# Altium PCB 假肢工作电路图.PcbDoc
Units mm, origin at the board's own origin, x right, y up, seen from the top; angles counter-clockwise.
Board outline 60.83 x 102.62 mm, 2 copper layers (Top Layer, Bottom Layer); 118 components, 92 nets, 450 pads, 0 vias.
Unrouted connection lines stored in the file: 279.
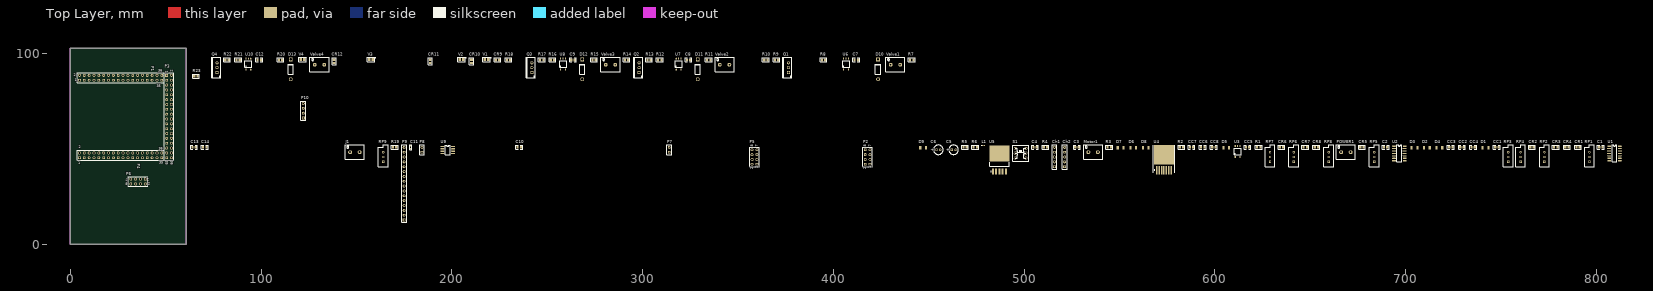
[diagram p0: Top Layer view]
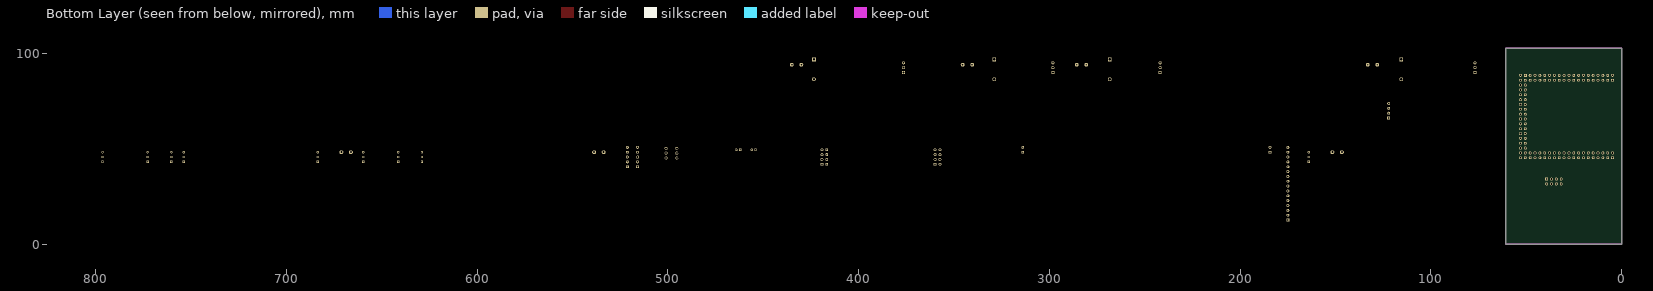
[diagram p1: Bottom Layer view, seen from below]

## Layer stack, top to bottom
Top Solder: solder mask 0.0102, Solder Resist, Dk 3.5
Top Layer: signal copper 0.0356
Dielectric 1: dielectric 0.32, FR-4, Dk 4.8
Bottom Layer: signal copper 0.0356
Bottom Solder: solder mask 0.0102, Solder Resist, Dk 3.5

## Board outline
0,0 60.833,0 60.833,102.616 0,102.616

## Design rules (kind name [scope] priority, off if disabled: settings)
Clearance Clearance_1 [P3 vs P1] p1: gap=0 ignorepadtopadclearanceinfootprint=FALSE
Clearance [All] p2: gap=0.254 ignorepadtopadclearanceinfootprint=FALSE except(0: Arc-Hole Track-Hole SMDPad-Hole THPad-Hole Via-Hole Fill-Hole Poly-Hole Region-Hole Text-Hole)
HoleToHoleClearance [All] p1 off: gap=0 allowstackedmicrovias=TRUE
MinimumSolderMaskSliver [All] p1 off: minsoldermaskwidth=0.254
NetAntennae [All] p1 off: netantennaetolerance=0
PolygonConnect [All] p1: connectstyle=Relief reliefconductorwidth=0.254 reliefentries=4 polygonreliefangle="90 Angle" airgapwidth=0.254
RoutingVias [All] p1: holewidth=0.711 width=1.27 viastyle="Through Hole" minholewidth=0.711 minwidth=1.27 maxholewidth=0.711 maxwidth=1.27
SilkToSilkClearance [All] p1 off: silktosilkclearance=0
SilkToSolderMaskClearance [IsPad] p1 off: minsilkscreentomaskgap=0 clearancetoexposedcopper=TRUE
SolderMaskExpansion [All] p1: expansion=0.102
Width [All] p1: maxlimit=0.254 minlimit=0.254 preferedwidth=0.254
25 further rules are at their usual default settings.

## Components (designator, comment, footprint, x,y, rotation, side; value= is the part's Value field where it differs from the comment)
C1 "104" LC-0805_C 802.259,50.673 r0 top
C2 "104" LC-0805_C 689.483,50.673 r0 top
C3 "0.1uF" LC-0805_C 527.685,50.673 r0 top
C4 "0.1uF" LC-0805_C 505.714,50.673 r0 top
C5 "10uF,16V" CAPPR2-5X5 463.042,49.403 r0 top value=680uF
C6 "10uF,16V" CAPPR2-5X5 455.041,49.403 r0 top value=220uF
C7 "0.1uF" LC-0805_C 411.988,96.52 r0 top
C8 "0.1uF" LC-0805_C 324.104,96.52 r0 top
C9 "0.1uF" LC-0805_C 263.525,96.52 r0 top
C10 "100nF" LC-0805_C 235.331,50.673 r0 top
C11 "100nF" 0603 178.562,50.038 r90 top
C12 "0.1uF" LC-0805_C 99.06,96.52 r0 top
C13 "27pF" LC-0805_C 64.897,50.673 r0 top value=25V
C14 "27pF" LC-0805_C 70.485,50.673 r0 top value=25V
CC1 "105" LC-0805_C 747.776,50.673 r0 top
CC2 "105" LC-0805_C 729.488,50.673 r0 top
CC3 "105" LC-0805_C 723.646,50.673 r0 top
CC4 "105" LC-0805_C 735.33,50.673 r0 top
CC5 "105" LC-0805_C 617.093,50.673 r0 top
CC6 "105" LC-0805_C 593.598,50.673 r0 top
CC7 "105" LC-0805_C 587.756,50.673 r0 top
CC8 "105" LC-0805_C 599.44,50.673 r0 top
Ch1 "Header 5" HDR1X5 515.874,40.513 r90 top
Ch2 "Header 5" HDR1X5 521.208,40.513 r90 top
CR1 "150" LC-0805_R 790.321,50.673 r0 top
CR2 "150" LC-0805_R 766.191,50.673 r0 top
CR3 "150" LC-0805_R 778.637,50.673 r0 top
CR4 "150" LC-0805_R 784.479,50.673 r0 top
CR5 "150" LC-0805_R 677.037,50.673 r0 top
CR6 "150" LC-0805_R 634.873,50.673 r0 top
CR7 "150" LC-0805_R 647.319,50.673 r0 top
CR8 "150" LC-0805_R 653.161,50.673 r0 top
CR9 "1K" LC-0805_R 223.901,96.52 r0 top
CR10 "1K" LC-0805_R 210.312,95.758 r90 top
CR11 "1K" LC-0805_R 188.722,95.758 r90 top
CR12 "1K" LC-0805_R 138.303,95.758 r90 top
D1 "Diode  Zener" LC-1206 741.807,50.546 r0 top
D2 "Diode  Zener" LC-1206 711.073,50.546 r0 top
D3 "Diode  Zener" LC-1206 704.596,50.546 r0 top
D4 "Diode  Zener" LC-1206 717.677,50.546 r0 top
D5 "Diode  Zener" LC-1206 605.917,50.546 r0 top
D6 "Diode  Zener" LC-1206 557.149,50.546 r0 top
D7 "Diode  Zener" LC-1206 550.545,50.546 r0 top
D8 "Diode  Zener" LC-1206 563.753,50.546 r0 top
D9 "IN5824" LC-1206 447.04,50.546 r0 top
D10 "Diode 1N4001" DO-41 423.418,91.567 r90 top
D11 "Diode 1N4001" DO-41 328.93,91.567 r90 top
D12 "Diode 1N4001" DO-41 268.351,91.567 r90 top
D13 "Diode 1N4001" DO-41 115.57,91.567 r90 top
J1 "端子2P" DUANZI2P 146.685,48.133 r0 top
L1 "Inductor" 0402-A 478.79,51.562 r0 top value=33uH
Motor1 "端子2P" DUANZI2P 533.654,48.133 r0 top
P1 "Header 18X2" HDR2X18 4.826,85.852 r0 top
P2 "Header 4X2" HDR2X4 419.227,41.783 r90 top
P3 "Header 18X2" HDR2X18 50.546,88.392 r270 top
P4 "Header 18X2" HDR2X18 4.826,45.212 r0 top
P5 "Header 4X2" HDR2X4 359.918,41.783 r90 top
P6 "Header 4X2" HDR2X4 39.37,34.036 r180 top
P7 "Header 2" HDR1X2 313.944,48.133 r90 top
P8 "Header 2" HDR1X2 184.404,48.133 r90 top
P9 "Header 16" HDR1X16 175.006,12.573 r90 top
P10 "Header 4" HDR1X4 122.174,66.04 r90 top
POWER1 "端子2P" DUANZI2P 666.115,48.133 r0 top
Q1 "IRF540N" TO-220AB 376.428,92.456 r90 top
Q2 "IRF540N" TO-220AB 298.196,92.456 r90 top
Q3 "IRF540N" TO-220AB 241.935,92.456 r90 top
Q4 "IRF540N" TO-220AB 76.962,92.456 r90 top
R1 "10k" LC-0805_R 622.935,50.673 r0 top
R2 "150" LC-0805_R 582.422,50.673 r0 top
R3 "50" LC-0805_R 544.576,50.673 r0 top
R4 "10k" LC-0805_R 511.175,50.673 r0 top
R5 "50" LC-0805_R 469.011,50.673 r0 top value=3.3K
R6 "1k" LC-0805_R 474.345,50.673 r0 top value=3.3K
R7 "10k" LC-0805_R 441.071,96.52 r0 top
R8 "150" LC-0805_R 394.843,96.52 r0 top
R9 "50" LC-0805_R 370.205,96.52 r0 top
R10 "10K" LC-0805_R 364.617,96.52 r0 top
R11 "10k" LC-0805_R 334.645,96.52 r0 top
R12 "150" LC-0805_R 308.991,96.52 r0 top
R13 "50" LC-0805_R 303.403,96.52 r0 top
R14 "10K" LC-0805_R 291.592,96.52 r0 top
R15 "10k" LC-0805_R 274.574,96.52 r0 top
R16 "150" LC-0805_R 252.73,96.52 r0 top
R17 "50" LC-0805_R 247.142,96.52 r0 top
R18 "10K" LC-0805_R 229.743,96.52 r0 top
R19 "120" LC-0805_R 170.053,50.673 r0 top
R20 "10k" LC-0805_R 110.236,96.52 r0 top
R21 "150" LC-0805_R 88.011,96.52 r0 top
R22 "50" LC-0805_R 82.169,96.52 r0 top
R23 "10K" LC-0805_R 65.899,88.011 r0 top
RP1 "Res Tap" VR5 796.29,45.593 r90 top value=10K
RP2 "Res Tap" VR5 772.668,45.593 r90 top value=10K
RP3 "Res Tap" VR5 753.745,45.593 r90 top value=10K
RP4 "Res Tap" VR5 760.222,45.593 r90 top value=10K
RP5 "Res Tap" VR5 683.514,45.593 r90 top value=10K
RP6 "Res Tap" VR5 641.35,45.593 r90 top value=10K
RP7 "Res Tap" VR5 628.904,45.593 r90 top value=10K
RP8 "Res Tap" VR5 659.638,45.593 r90 top value=10K
RP9 "Res Tap" VR5 164.084,45.593 r90 top value=10K
S1 "SW DPDT" AN88 498.094,47.625 r0 top
U1 "LM324AD" SO-14 803.021,53.213 r0 top
U2 "LM324AD" SO-14 690.245,53.213 r0 top
U3 "TLP155" so6 610.616,45.593 r0 top
U4 "BTS7960" BTS7960 573.278,46.863 r0 top
U5 "LM2596S-5.0" TS5B_N 487.045,44.069 r90 top
U6 "TLP155" so6 405.384,91.44 r0 top
U7 "TLP155" so6 317.627,91.44 r0 top
U8 "TLP155" so6 257.048,91.44 r0 top
U9 "TLE6250" SO-8 195.072,51.181 r0 top
U10 "TLP155" so6 92.075,91.44 r0 top
V1 "LED Chip" CLED2012-0805 218.186,96.647 r0 top
V2 "LED Chip" CLED2012-0805 205.105,96.647 r0 top
V3 "LED Chip" CLED2012-0805 157.734,96.647 r0 top
V4 "LED Chip" CLED2012-0805 121.666,96.647 r0 top
Valve1 "端子2P" DUANZI2P 430.022,93.98 r0 top
Valve2 "端子2P" DUANZI2P 340.487,93.98 r0 top
Valve3 "端子2P" DUANZI2P 280.67,93.98 r0 top
Valve4 "端子2P" DUANZI2P 128.143,93.98 r0 top

## Footprints (in the part's own frame and the unit in brackets; to place one, negate y for a bottom-side part, rotate by r counter-clockwise, add the part's x,y. Pads: shape width x height; smd on the part's side, far side on the other; paste and mask are expansions set on the pad)
0402-A [mm] "Chip Inductor, Body 1.0x0.5mm, IPC High Density"
  rect 0.6x0.5 smd: 1(-0.5,0) 2(0.5,0)
  silkscreen extent -1.1,-0.15 -1.1,0.15, body extent -0.55,-0.3 0.55,0.3, height 0.55
0603 [mil]
  rect 30x30 smd: 1(0,0) 2(55,0)
  silkscreen extent -20,-20 75,20
AN88 [mil]
  round 60 hole 40: 1(-110,100) 2(-110,0) 3(-110,-100) 4(110,-100) 5(110,0) 6(110,100)
  silkscreen extent -165,-165 165,165
BTS7960 [mm] "贴片BTS7960"
  rect 0.8x4.6 smd: 1(-3.81,-8.255) 2(-2.54,-8.255) 3(-1.27,-8.255) 4(0,-8.255) 5(1.27,-8.255) 6(2.54,-8.255) 7(3.81,-8.255)
  rect 10.5x10.3 smd: 8(0,-0.127)
  silkscreen extent -5.59,-9.53 5.68,4.96
CAPPR2-5X5 [mm]
  rect 1.25x1.25 hole 0.75: 1(-1,0)
  round 1.25 hole 0.75: 2(1,0)
  silkscreen extent -2.5,-2.5 2.5,2.5, body extent -2.5,-2.5 2.5,2.5, height 5
CLED2012-0805 [mm]
  rect 1.3x1.5 smd: 1(-0.95,0) 2(0.95,0)
  silkscreen extent -2,-1.15 2.36,1.15, body extent -1,-0.63 1,0.62, height 0.7
DO-41 [mm] "Diode, Axial; Body 5.2 x 2.7 mm (LxDia. max), Lead Dia. 0.86 mm (max)"
  round 2 hole 1.2: 1(-5.23,0)
  rect 2x2 hole 1.2: 2(5.23,0)
  silkscreen extent -2.65,-1.4 2.75,1.4
DUANZI2P [mm]
  round 2 hole 1: 0(0,0) 1(5,0)
  silkscreen extent -2.5,-3.8 7.5,3.8
HDR1X2 [mm] "Connector; Header; 2 Position"
  rect 1.5x1.5 hole 0.9: 1(0,0)
  round 1.5 hole 0.9: 2(2.54,0)
  silkscreen extent -1.27,-1.27 3.81,1.27
HDR1X4 [mm] "Connector; Header; 4 Position"
  rect 1.5x1.5 hole 0.9: 1(0,0)
  round 1.5 hole 0.9: 2(2.54,0) 3(5.08,0) 4(7.62,0)
  silkscreen extent -1.27,-1.27 8.89,1.27
HDR1X5 [mm] "Connector; Header; 5 Position"
  rect 1.5x1.5 hole 0.9: 1(0,0)
  round 1.5 hole 0.9: 2(2.54,0) 3(5.08,0) 4(7.62,0) 5(10.16,0)
  silkscreen extent -1.27,-1.27 11.43,1.27
HDR1X16 [mm] "Connector; Header; 16 Position"
  rect 1.5x1.5 hole 0.9: 1(0,0)
  round 1.5 hole 0.9: 2(2.54,0) 3(5.08,0) 4(7.62,0) 5(10.16,0) 6(12.7,0) 7(15.24,0) 8(17.78,0) 9(20.32,0) 10(22.86,0) 11(25.4,0) 12(27.94,0) 13(30.48,0) 14(33.02,0) 15(35.56,0) 16(38.1,0)
  silkscreen extent -1.27,-1.27 39.37,1.27
HDR2X4 [mm] "Connector; Header; 4x2 Position"
  rect 1.5x1.5 hole 0.9: 1(0,0)
  round 1.5 hole 0.9: 2(0,2.54) 3(2.54,0) 4(2.54,2.54) 5(5.08,0) 6(5.08,2.54) 7(7.62,0) 8(7.62,2.54)
  silkscreen extent -1.27,-1.27 8.89,3.81
HDR2X18 [mm] "Connector; Header; 18x2 Position"
  rect 1.5x1.5 hole 0.9: 1(0,0)
  round 1.5 hole 0.9: 2(0,2.54) 3(2.54,0) 4(2.54,2.54) 5(5.08,0) 6(5.08,2.54) 7(7.62,0) 8(7.62,2.54) 9(10.16,0) 10(10.16,2.54) 11(12.7,0) 12(12.7,2.54) 13(15.24,0) 14(15.24,2.54) 15(17.78,0) 16(17.78,2.54) 17(20.32,0) 18(20.32,2.54) 19(22.86,0) 20(22.86,2.54) 21(25.4,0) 22(25.4,2.54) 23(27.94,0) 24(27.94,2.54) 25(30.48,0) 26(30.48,2.54) 27(33.02,0) 28(33.02,2.54) 29(35.56,0) 30(35.56,2.54) 31(38.1,0) 32(38.1,2.54) 33(40.64,0) 34(40.64,2.54) 35(43.18,0) 36(43.18,2.54)
  silkscreen extent -1.27,-1.27 44.45,3.81
LC-0805_C [mm]
  rect 1.16x1.47 smd: 1(-0.875,0) 2(0.875,0)
  silkscreen extent -1.78,-1.06 1.78,1.06, body extent -1,-0.62 1,0.63, height 0.77
LC-0805_R [mm]
  rect 1.16x1.47 smd: 1(-0.875,0) 2(0.875,0)
  silkscreen extent -1.78,-1.06 1.78,1.06, body extent -1,-0.62 1,0.63, height 0.49
LC-1206 [mm]
  rect 1.13x1.8 smd: 1(-1.49,0) 2(1.49,0)
so6 [mm]
  oct 0.6x1 smd: 1(0,0) 3(2.54,0) 4(2.54,5.775) 5(1.27,5.775) 6(0,5.775)
  silkscreen extent -0.58,1.22 3.12,4.57
SO-8 [mil]
  rect 80x24 smd: 1(0,0)
  oval 80x24 smd: 2(0,-50) 3(0,-100) 4(0,-150) 5(220,-150) 6(220,-100) 7(220,-50) 8(220,0)
  silkscreen extent 60,-175 160,25
SO-14 [mil]
  oval 80x24 smd: 1(142,-76) 2(142,-126) 3(142,-176) 4(142,-226) 5(142,-276) 6(142,-326) 7(142,-376) 8(362,-376) 9(362,-326) 10(362,-276) 11(362,-226) 12(362,-176) 13(362,-126) 14(362,-76)
  silkscreen extent 202,-401 302,-51
TO-220AB [mm] "TO, Thru-Hole, Vertical, Heatsink Mounted; 3 In-Line Leads; Pitch 2.54 mm"
  rect 1.6x1.6 hole 1: 1(-2.54,0)
  round 1.6 hole 1: 2(0,0) 3(2.54,0)
  silkscreen extent -5.35,-1.85 5.35,2.85, body extent -5.4,-1.9 5.4,2.9, height 19.3
TS5B_N [mm] "D2-PAK, 6-Leads, Body 8.6x10.2mm, Pitch 1.7mm, Lead Span 14.1mm, IPC Medium Density"
  rect 3.2x1.05 smd: 1(-6,3.4) 2(-6,1.7) 3(-6,0) 4(-6,-1.7) 5(-6,-3.4)
  rect 8.3x10.45 smd: 6(3.45,0)
  silkscreen extent -6.12,-5.2 -1.1,5.2, body extent -3.35,-5.2 6.05,5.2, height 4.65
VR5 [mm] "Thru-Hole; 3 Leads"
  rect 1.2x1.2 hole 0.7: 1(-2.54,0)
  round 1.2 hole 0.7: 2(0,0) 3(2.54,0)
  silkscreen extent -5.08,-2.54 6.35,2.54

## Part data
C1 C2: library part CAP(瓷片,104), "1.02.08.0014"
C3 C4 C7 C8 C9 C10 C12 C13 C14: library part Cap, "Capacitor", LatestRevisionDate=17-Jul-2002, LatestRevisionNote="Re-released for DXP Platform.", PackageDescription="Radial Cap, Thru-Hole; 2 Leads; 0.3 in Pin Spacing", PackageReference=RAD-0.3, Published=8-Jun-2000, Publisher="Altium Limited"
C5 C6: library part "Cap Pol 2x5", "Polarized Capacitor (Radial)", Voltage=16V, Published=8-Jun-2000, Publisher="Altium Limited", Revision="July-2002: Re-released for DXP Platform."
C11: library part C1
CC1 CC2 CC3 CC4 CC5 CC6 CC7 CC8: library part "Cap Chip 0805", "Polarized Capacitor (Radial)", Published=8-Jun-2000, Publisher="Altium Limited", Revision="July-2002: Re-released for DXP Platform."
Ch1 Ch2: "Header, 5-Pin", LatestRevisionDate=17-Jul-2002, LatestRevisionNote="Re-released for DXP Platform.", Publisher="Altium Limited"
CR1 CR2 CR3 CR4 CR5 CR6 CR7 CR8 CR9 CR10 CR11 CR12: library part "Resistor Chip 0805", "Resistor", Published=8-Jun-2000, Publisher="Altium Limited", Revision="July-2002: Re-released for DXP Platform."
D1 D2 D3 D4 D5 D6 D7 D8: "Zener Diode", Published=8-Jun-2000, Publisher="Altium Limited", Revision="July-2002: Re-released for DXP Platform."
D9: library part "Diode  Zener", "Zener Diode", Published=8-Jun-2000, Publisher="Altium Limited", Revision="July-2002: Re-released for DXP Platform."
D10 D11 D12 D13: "1 Amp General Purpose Rectifier", Code_JEDEC=DO-204-AL, ComponentLink1Description="Manufacturer Link", ComponentLink1URL=http://www.fairchildsemi.com/, ComponentLink2Description=Datasheet, ComponentLink2URL=http://www.fairchildsemi.com/ds/1N%2F1N4001.pdf, DatasheetVersion=1998, LatestRevisionDate=17-Jul-2002, LatestRevisionNote="Re-released for DXP Platform.", PackageDescription="Diode, Axial; Body 5.2 x 2.7 mm (LxDia. max), Lead Dia. 0.86 mm (max)", PackageReference=DO-41, PackageVersion=Aug-1999, Published=8-Jun-2000, Publisher="Altium Limited"
J1 Motor1 POWER1 Valve1 Valve2 Valve3 Valve4: library part DUANZI2
P1 P3 P4: "Header, 18-Pin, Dual row", LatestRevisionDate=17-Jul-2002, LatestRevisionNote="Re-released for DXP Platform.", Publisher="Altium Limited"
P2 P5 P6: "Header, 4-Pin, Dual row", LatestRevisionDate=17-Jul-2002, LatestRevisionNote="Re-released for DXP Platform.", Publisher="Altium Limited"
P7 P8: "Header, 2-Pin", LatestRevisionDate=17-Jul-2002, LatestRevisionNote="Re-released for DXP Platform.", Publisher="Altium Limited"
P9: "Header, 16-Pin", LatestRevisionDate=17-Jul-2002, LatestRevisionNote="Re-released for DXP Platform.", Publisher="Altium Limited"
P10: "Header, 4-Pin", LatestRevisionDate=17-Jul-2002, LatestRevisionNote="Re-released for DXP Platform.", Publisher="Altium Limited"
Q1 Q2 Q3 Q4: "HEXFET Power MOSFET", ComponentLink1Description="Manufacturer Link", ComponentLink1URL=http://www.irf.com/, ComponentLink2Description=Datasheet, ComponentLink2URL=http://www.irf.com/product-info/datasheets/data/irf540n.pdf, DatasheetVersion=May-1998, LatestRevisionDate=17-Jul-2002, LatestRevisionNote="Re-released for DXP Platform.", Note="Pin 2 is electrically connected to pin 4.", PackageDescription="TO, Thru-Hole, Vertical, Heatsink Mounted; 3 In-Line Leads; Pitch 2.54 mm", PackageReference=TO-220AB, PackageVersion=Feb-1997, Published=8-Jun-2000, Publisher="Altium Limited", Sim Note="Thermal Model provided is not called on from main Subckt."
R1 R2 R3 R4 R5 R6 R7 R8 R9 R10 R11 R12 R13 R14 R15 R16 R17 R18 R19 R20 R21 R22 R23: library part Res2, "Resistor", LatestRevisionDate=17-Jul-2002, LatestRevisionNote="Re-released for DXP Platform.", PackageDescription="Axial Device, Thru-Hole; 2 Leads; 0.4 in Pin Spacing", PackageReference=AXIAL-0.4, Published=8-Jun-2000, Publisher="Altium Limited"
RP1 RP2 RP3 RP4 RP5 RP6 RP7 RP8 RP9: "Tapped Resistor", LatestRevisionDate=17-Jul-2002, LatestRevisionNote="Re-released for DXP Platform.", PackageDescription="Variable Resistor, Thru-Hole; 3 Leads", PackageReference=VR3, Published=24-Mar-1999, Publisher="Altium Limited", Set Position=0.5, Sim Note="Enter the Resistance value and the set point into parameter fields."
S1: "Switch", Code_IPC=SOT26A-6, Code_JEITA=SC-74, LatestRevisionDate=29-May-2009, LatestRevisionNote="IPC-7351 Footprint Added.", PackageDescription="6-Pin SOT-23 Package 0.95 mm Pitch, 2.7 mm Lead Span", PackageReference=SOT23-6, PackageVersion=Mar-2001, Published=24-Mar-1999, Publisher="Altium Limited"
U1 U2: "Quadruple Operational Amplifier", PackageDocument=Jan-1998, ComponentLink1Description="Manufacturer Link", ComponentLink1URL=http://www.ti.com/, DatasheetDocument=Jan-1989, LatestRevisionDate=4-Mar-2005, LatestRevisionNote="Stylized 3D Model Added.", PackageReference=D014, Published=15-Apr-2002, Publisher="Altium Limited"
U4: library part Component_1_1
U5: "SIMPLE SWITCHER?Power Converter 150 KHz 3A Step-Down Voltage Regulator, 5-pin TO-263", Manufacturer="National Semiconductor", PackageTopMarking="NSUZXYTTE#*LM2596S*-5.0 P+", PowerWise=N, Supplier Part Number 1=1214546, Code_JEDEC=MO-169-AB, ComponentLink1Description="LM2596 Datasheet", ComponentLink1URL=http://www.national.com/ds/LM/LM2596.pdf, ComponentLink2Description="LM2596 Web Page", ComponentLink2URL=http://www.national.com/pf/LM/LM2596.html, ComponentLink3Description="TS5B Package Page", ComponentLink3URL=http://www.national.com/packaging/folders/ts5b.html, CompType=Switcher, DatasheetVersion=May-2002, PackageDescription="TO-263, Molded, .400 x .390 x .180in, 5 Lead, .067in Pitch, Surface Mount", PackageReference=TS5B, PackageVersion="revD, Apr-2005", PartNumber=LM2596S-5.0, PinCount=5, Published=4-Dec-2008, Publisher="Altium Limited", RoHS=N, Supplier 1=Farnell
V1 V2 V3 V4: "Typical Chip LED", Published=8-Jun-2000, Publisher="Altium Limited", Revision="July-2002: Re-released for DXP Platform."
L1: Code_IEC=1005, Code_JEITA=0402, LatestRevisionDate=29-May-2009, LatestRevisionNote="IPC-7351 Footprint Added.", PackageDescription="Chip Inductor", PackageReference=0402-A, Published=8-Jun-2000, Publisher="Altium Limited"

## Nets (pads, with @x,y where several pads share a name; then routed paths per layer and width w, separated by ;. In a path a pad name is that pad's centre, name@x,y a point inside that pad or via, vN(x,y) a via of type N, cw(c..) or ccw(c..) an arc to the next point about the centre after c; other vN are vias at no path point)
A1: CC1.2 D1.2 P2.2 RP1.3
A2: CC2.2 D2.2 P2.4 RP2.3
A3: CC3.2 D3.2 P2.6 RP3.3
A4: CC4.2 D4.2 P2.8 RP4.3
A5: CC5.2 D5.2 P5.2 RP5.3
A6: CC6.2 D6.2 P5.4 RP6.3
A7: CC7.2 D7.2 P5.6 RP7.3
A8: CC8.2 D8.2 P5.8 RP8.3
ADAIN0: P1.9 P2.1
ADAIN1: P1.12 P2.3
ADAIN2: P1.11 P2.5
ADAIN3: P1.14 P2.7
ADAIN4: P1.13 P5.1
ADAIN5: P1.16 P5.3
ADAIN6: P1.15 P5.5
ADAIN7: P1.18 P5.7
DV5: C10.1 C11.2 P1.2 P9.2 P9.15 RP9.1 S1.3 S1.6 U4.3 U9.3
EPWM1_A: P7.2 R1.1 R2.1
GND: C1.2 C2.2 C3.2 C4.2 C5.2 C6.2 C7.2 C8.2 C9.2 C10.2 C11.1 C12.2 C13.1 C14.1 CC1.1 CC2.1 CC3.1 CC4.1 CC5.1 CC6.1 CC7.1 CC8.1 Ch1.5 Ch2.5 CR1.2 CR2.2 CR3.2 CR4.2 CR5.2 CR6.2 CR7.2 CR8.2 D1.1 D2.1 D3.1 D4.1 D5.1 D6.1 D7.1 D8.1 D9.1 Motor1.1 P3.1 P3.2 P9.1 P9.5 P9.16 P10.4 POWER1.1 Q1.3 Q2.3 Q3.3 Q4.3 R4.1 R5.1 R6.1 R10.1 R14.1 R18.1 R23.1 RP1.1 RP2.1 RP3.1 RP4.1 RP5.1 RP6.1 RP7.1 RP8.1 RP9.2 U1.11 U2.11 U3.3 U3.4 U4.1 U5.3 U5.5 U5.6 U6.3 U6.4 U7.3 U7.4 U8.3 U8.4 U9.2 U9.8 U10.3 U10.4 V1.2 V2.2 V3.2 V4.2
GPIO0: P1.32 P7.1
GPIO14: P3.13 P10.3
GPIO15: P3.14 P10.2
GPIO30: P1.34 U9.4
GPIO31: P1.33 U9.1
GPIO37: P3.26 P9.4
GPIO38: P3.34 P9.6
GPIO40: P3.23 P9.7
GPIO41: P3.24 P9.8
GPIO42: P3.21 P9.9
GPIO43: P3.18 P9.10
GPIO44: P3.17 P9.11
GPIO45: P3.16 P9.12
GPIO46: P3.11 P9.13
GPIO47: P3.10 P9.14
GPIO50: P4.33 P6.7
GPIO51: P4.32 P6.5
GPIO52: P4.24 P6.3
GPIO53: P4.23 P6.1
GPIO_50: CR12.1 P6.8 R20.1 R21.1
GPIO_51: CR11.1 P6.6 R15.1 R16.1
GPIO_52: CR10.1 P6.4 R11.1 R12.1
GPIO_53: CR9.1 P6.2 R7.1 R8.1
IN1: Ch1.1 CR1.1 U1.3
IN2: Ch1.2 CR2.1 U1.5
IN3: Ch1.3 CR3.1 U1.10
IN4: Ch1.4 CR4.1 U1.12
IN5: Ch2.1 CR5.1 U2.3
IN6: Ch2.2 CR6.1 U2.5
IN7: Ch2.3 CR7.1 U2.10
IN8: Ch2.4 CR8.1 U2.12
NetC6_1: C6.1 L1.2 S1.1 S1.5 U5.4
NetC13_2: C13.2 J1.1 P8.2 U9.6
NetC14_2: C14.2 J1.0 R19.1 U9.7
NetCR9_2: CR9.2 V1.1
NetCR10_2: CR10.2 V2.1
NetCR11_2: CR11.2 V3.1
NetCR12_2: CR12.2 V4.1
NetD9_2: D9.2 L1.1 U5.2
NetD10_1: D10.1 Q1.2 Valve1.1
NetD11_1: D11.1 Q2.2 Valve2.1
NetD12_1: D12.1 Q3.2 Valve3.1
NetD13_1: D13.1 Q4.2 Valve4.1
NetP8_1: P8.1 R19.2
NetP9_3: P9.3 RP9.3
NetQ1_1: Q1.1 R9.2 R10.2
NetQ2_1: Q2.1 R13.2 R14.2
NetQ3_1: Q3.1 R17.2 R18.2
NetQ4_1: Q4.1 R22.2 R23.2
NetR2_2: R2.2 U3.1
NetR3_1: R3.1 U3.5
NetR3_2: R3.2 R4.2 U4.2
NetR5_2: R5.2 U4.5
NetR6_2: R6.2 U4.6
NetR8_2: R8.2 U6.1
NetR9_1: R9.1 U6.5
NetR12_2: R12.2 U7.1
NetR13_1: R13.1 U7.5
NetR16_2: R16.2 U8.1
NetR17_1: R17.1 U8.5
NetR21_2: R21.2 U10.1
NetR22_1: R22.1 U10.5
NetRP1_2: RP1.2 U1.1 U1.2
NetRP2_2: RP2.2 U1.6 U1.7
NetRP3_2: RP3.2 U1.8 U1.9
NetRP4_2: RP4.2 U1.13 U1.14
NetRP5_2: RP5.2 U2.1 U2.2
NetRP6_2: RP6.2 U2.6 U2.7
NetRP7_2: RP7.2 U2.8 U2.9
NetRP8_2: RP8.2 U2.13 U2.14
OUT: Motor1.0 U4.4 U4.8
POWERA: C1.1 C2.1 C3.1 C4.1 C5.1 C7.1 C8.1 C9.1 C12.1 D10.2 D11.2 D12.2 D13.2 POWER1.0 U1.4 U2.4 U3.6 U4.7 U5.1 U6.6 U7.6 U8.6 U10.6 Valve1.0 Valve2.0 Valve3.0 Valve4.0
VDD3.3: P4.36 P10.1 R1.2 R7.2 R11.2 R15.2 R20.2 U9.5
pads on no net: P1.1 P1.3 P1.4 P1.5 P1.6 P1.7 P1.8 P1.10 P1.17 P1.19 P1.20 P1.21 P1.22 P1.23 P1.24 P1.25 P1.26 P1.27 P1.28 P1.29 P1.30 P1.31 P1.35 P1.36 P3.3 P3.4 P3.5 P3.6 P3.7 P3.8 P3.9 P3.12 P3.15 P3.19 P3.20 P3.22 P3.25 P3.27 P3.28 P3.29 P3.30 P3.31 P3.32 P3.33 P3.35 P3.36 P4.1 P4.2 P4.3 P4.4 P4.5 P4.6 P4.7 P4.8 P4.9 P4.10 P4.11 P4.12 P4.13 P4.14 P4.15 P4.16 P4.17 P4.18 P4.19 P4.20 P4.21 P4.22 P4.25 P4.26 P4.27 P4.28 P4.29 P4.30 P4.31 P4.34 P4.35 S1.2 S1.4

## Keep-outs
Keep-Out Layer:
  the board outline again, w0.254

## Text inside footprints (layer, text, board x,y; h text height)
C5: Top Overlay "+" at 459.067,48.653 h1.5
C6: Top Overlay "+" at 451.066,48.653 h1.5
P1: Top Overlay "36" at 46.228,90.424 h1.27; Top Overlay "35" at 45.466,82.296 h1.27; Top Overlay "1" at 2.286,85.344 h1.27; Top Overlay "2" at 1.778,87.884 h1.27
P2: Top Overlay "2" at 417.195,39.243 h1.27 r90; Top Overlay "1" at 419.735,39.751 h1.27 r90; Top Overlay "7" at 419.735,50.927 h1.27 r90; Top Overlay "8" at 417.195,50.927 h1.27 r90
P3: Top Overlay "36" at 52.578,43.688 h1.27 r270; Top Overlay "35" at 50.038,43.688 h1.27 r270; Top Overlay "1" at 50.038,90.932 h1.27 r270; Top Overlay "2" at 52.578,91.44 h1.27 r270
P4: Top Overlay "36" at 46.482,49.53 h1.27; Top Overlay "35" at 46.736,42.164 h1.27; Top Overlay "1" at 4.318,41.783 h1.27; Top Overlay "2" at 4.445,50.165 h1.27
P5: Top Overlay "2" at 357.886,39.243 h1.27 r90; Top Overlay "1" at 360.426,39.751 h1.27 r90; Top Overlay "7" at 360.426,50.927 h1.27 r90; Top Overlay "8" at 357.886,50.927 h1.27 r90
P6: Top Overlay "2" at 41.91,32.004 h1.27 r180; Top Overlay "1" at 41.402,34.544 h1.27 r180; Top Overlay "7" at 30.226,34.544 h1.27 r180; Top Overlay "8" at 30.226,32.004 h1.27 r180